# EAGLE board programmer-shield-cnc (EAGLE 6.4)
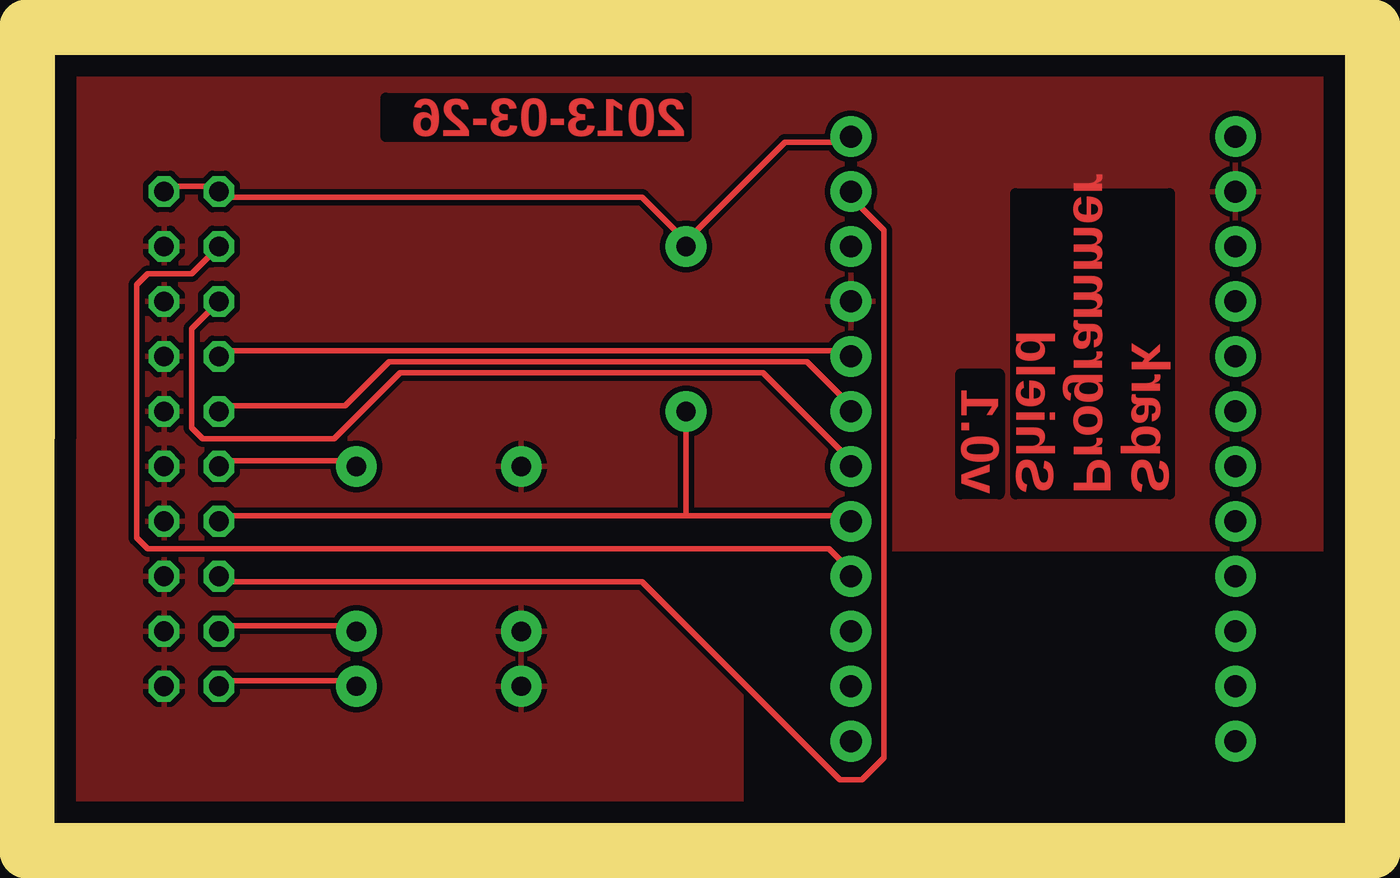
[diagram p0: board, top side]
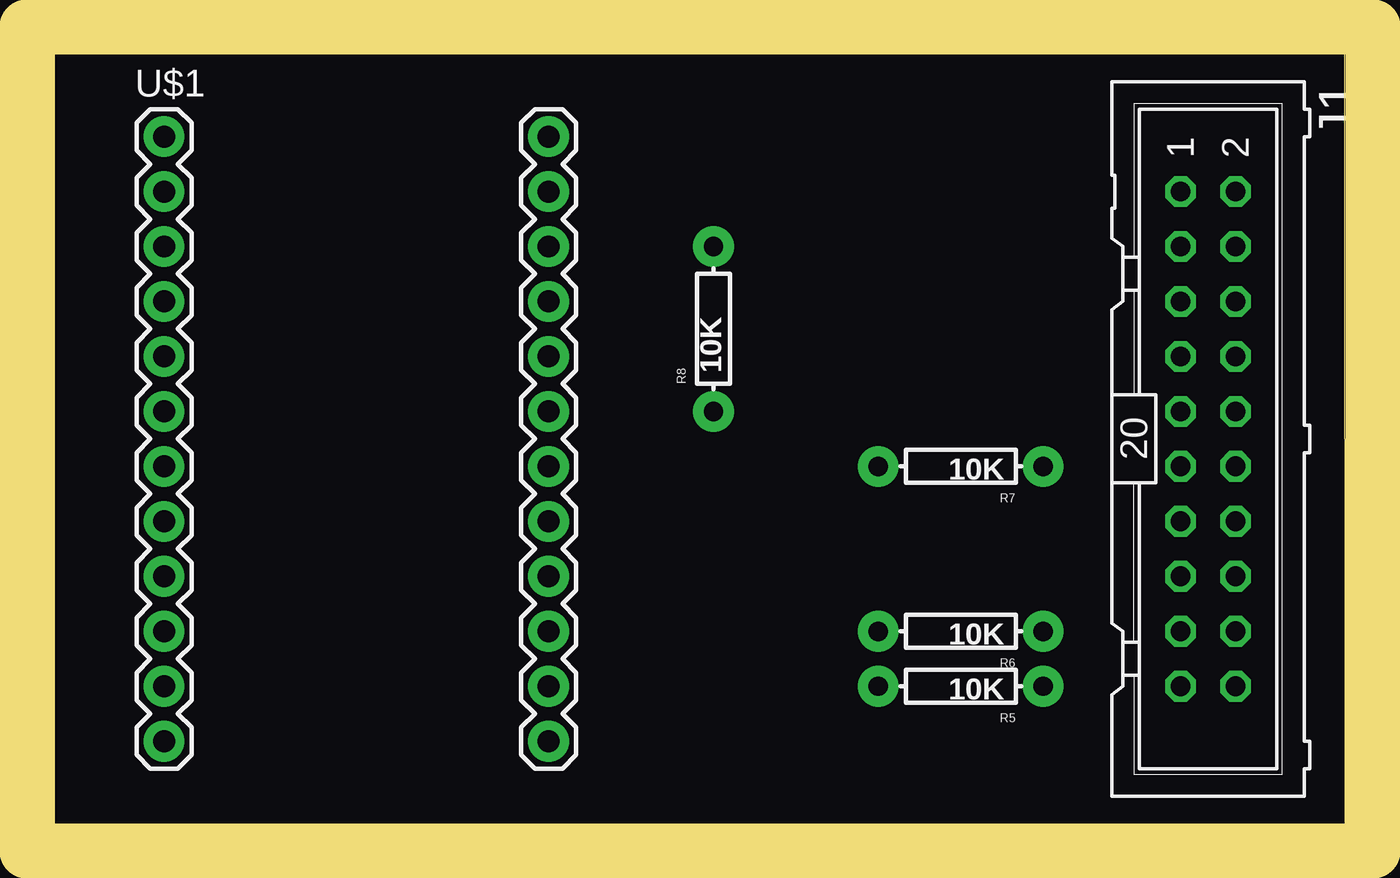
[diagram p1: board, bottom side, seen from below]

Size 59.69 x 35.56 mm. Coordinates in mm from the lower left corner, seen from the top.
Outline: 59.69,0 0,0 0.02,35.56 59.69,35.56 59.69,0
Copper layers (1*16): Top 0.035mm / dielectric 1.5mm / Bottom 0.035mm
Design rules "default *": minimum track width 10mil, minimum drill 24mil, track to track 10mil, track to pad 10mil, pad to pad 10mil, via to via 10mil, smd to smd 10mil, copper to edge 40mil, drill to drill 8mil, minimum pad ring 10mil, minimum via ring 8mil, stop-mask expansion 4mil, vias tented up to drill 0mil, thermal gap 10mil
Milling: 4 lines

## Footprints (pad centres in the part's own frame; a part is rotated, then mirrored left to right if it is on the bottom)
ML20 = drill 0.914 octagon: 1 -11.43,-1.27; 2 -11.43,1.27; 3 -8.89,-1.27; 4 -8.89,1.27; 5 -6.35,-1.27; 6 -6.35,1.27; 7 -3.81,-1.27; 8 -3.81,1.27; 9 -1.27,-1.27; 10 -1.27,1.27; 11 1.27,-1.27; 12 1.27,1.27; 13 3.81,-1.27; 14 3.81,1.27; 15 6.35,-1.27; 16 6.35,1.27; 17 8.89,-1.27; 18 8.89,1.27; 19 11.43,-1.27; 20 11.43,1.27
AXIAL-0.3 = drill 0.9 pad 1.88: P$1 -3.81,0; P$2 3.81,0
SPARK_CORE = drill 1.016 pad 1.88: 1 -8.89,13.97; 2 -8.89,11.43; 3 -8.89,8.89; 4 -8.89,6.35; 5 -8.89,3.81; 6 -8.89,1.27; 7 -8.89,-1.27; 8 -8.89,-3.81; 9 -8.89,-6.35; 10 -8.89,-8.89; 11 -8.89,-11.43; 12 -8.89,-13.97; 13 8.89,-13.97; 14 8.89,-11.43; 15 8.89,-8.89; 16 8.89,-6.35; 17 8.89,-3.81; 18 8.89,-1.27; 19 8.89,1.27; 20 8.89,3.81; 21 8.89,6.35; 22 8.89,8.89; 23 8.89,11.43; 24 8.89,13.97

## Placement (x,y rotation side)
J1  [ML20]  6.35,17.78 270 bottom
R5  10K  [AXIAL-0.3]  17.78,6.35 180 bottom
R6  10K  [AXIAL-0.3]  17.78,8.89 180 bottom
R7  10K  [AXIAL-0.3]  17.78,16.51 180 bottom
R8  10K  [AXIAL-0.3]  29.21,22.86 90 bottom
U$1  SPARK_CORECORE  [SPARK_CORE]  45.72,17.78 0 bottom

## Library data of the parts
J1 = con-harting-ml
R5-R8 = SparkFun-Passives
U$1 = Spark

## Nets
!RST: J1.15 U$1.23
+3V3: J1.1 J1.2 R8.P$2 U$1.24
GND: J1.4 J1.6 J1.8 J1.10 J1.12 J1.14 J1.16 J1.18 J1.20 R5.P$2 R6.P$2 R7.P$2 U$1.2 U$1.21
N$13: J1.19 R5.P$1
N$14: J1.17 R6.P$1
N$15: J1.11 R7.P$1
RAW: U$1.1
TCK: J1.9 U$1.19
TDI: J1.5 U$1.18
TDO: J1.13 R8.P$1 U$1.17
TMS: J1.7 U$1.20
TRST: J1.3 U$1.16
VDDA: U$1.22

## Tracks (layer width: path | path; a pad name or v marks a point on that pad's centre or on a via)
!RST
  Top 0.254: J1.15 7.87,11.18 27.18,11.18 36.32,2.03 37.34,2.03 38.35,3.05 38.35,27.43 36.83,28.96 U$1.23
+3V3
  Top 0.254: J1.2 5.33,29.46 7.37,29.46 J1.1 7.87,28.96 27.18,28.96 29.21,26.92 | 29.21,26.92 33.78,31.5 36.83,31.5 U$1.24 | 29.21,26.92 R8.P$2
GND
  pour Top: 59.69,35.56 59.69,12.7 31.75,12.7 31.75,0 0,0 0,35.56
N$13
  Top 0.254: J1.19 7.87,6.6 13.97,6.6 R5.P$1
N$14
  Top 0.254: J1.17 7.87,9.14 13.97,9.14 R6.P$1
N$15
  Top 0.254: J1.11 7.87,16.76 13.97,16.76 R7.P$1
TCK
  Top 0.254: J1.9 7.87,19.3 13.46,19.3 15.49,21.34 34.8,21.34 36.83,19.3 U$1.19
TDI
  Top 0.254: J1.5 6.35,22.86 6.35,18.29 6.86,17.78 12.95,17.78 16,20.83 32.77,20.83 36.83,16.76 U$1.18
TDO
  Top 0.254: 29.21,14.22 36.83,14.22 U$1.17 | 29.21,14.22 7.87,14.22 J1.13 | 29.21,14.22 R8.P$1
TMS
  Top 0.254: J1.7 7.87,21.84 36.83,21.84 U$1.20
TRST
  Top 0.254: J1.3 6.35,25.4 4.32,25.4 3.81,24.89 3.81,13.21 4.32,12.7 35.81,12.7 36.83,11.68 U$1.16

## Text on the board
Top: 2013-03-26 | v0.1 | Spark / Programmer / Shield